# Altium PCB KCNFEQ_V0.1.PcbDoc
Units mil, origin at the board's own origin, x right, y up, seen from the top; angles counter-clockwise.
Board outline 1840 x 1600 mil, 2 copper layers (Top Layer, Bottom Layer); 24 components, 17 nets, 64 pads, 0 vias.
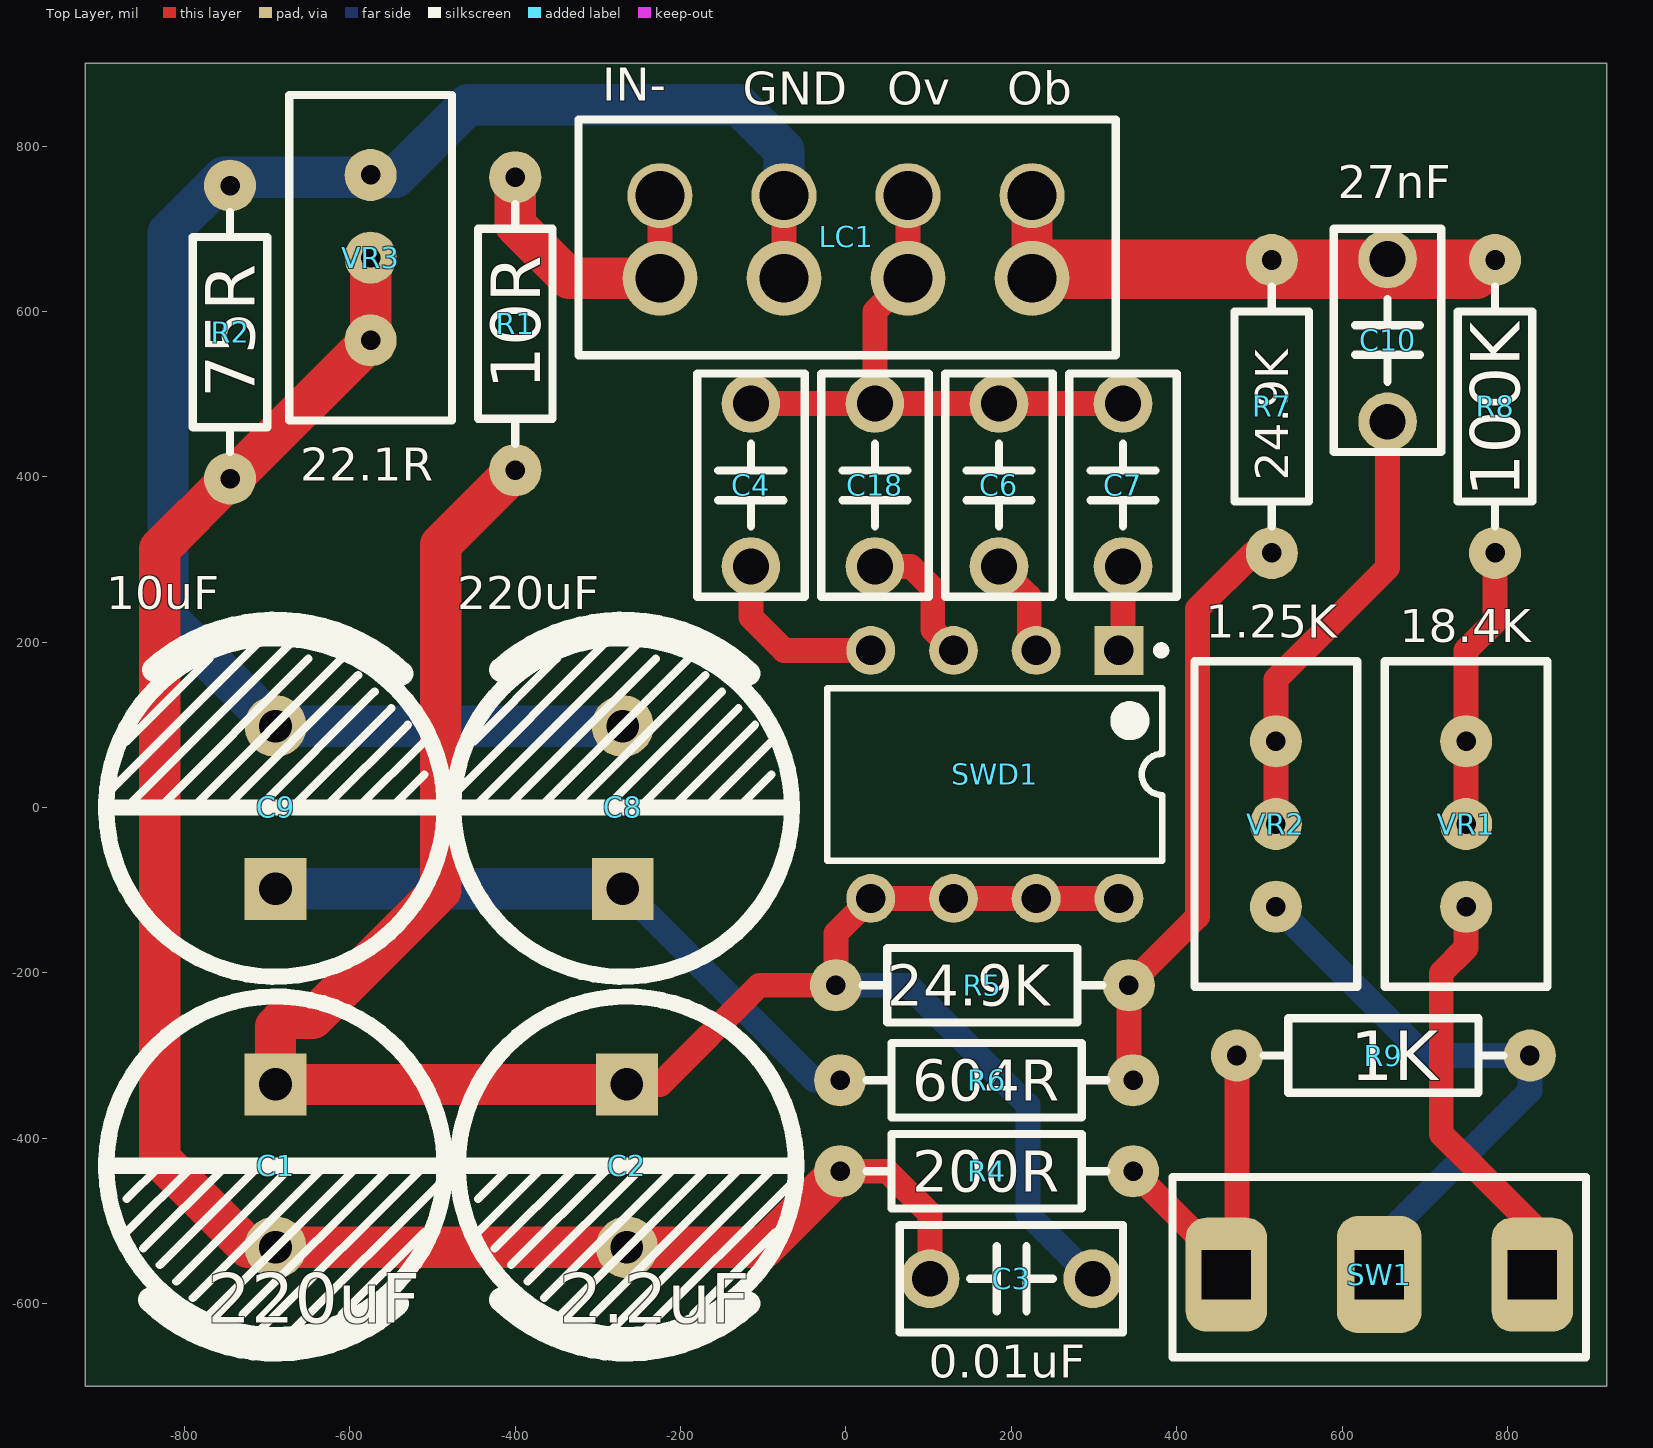
[diagram p0: Top Layer view]
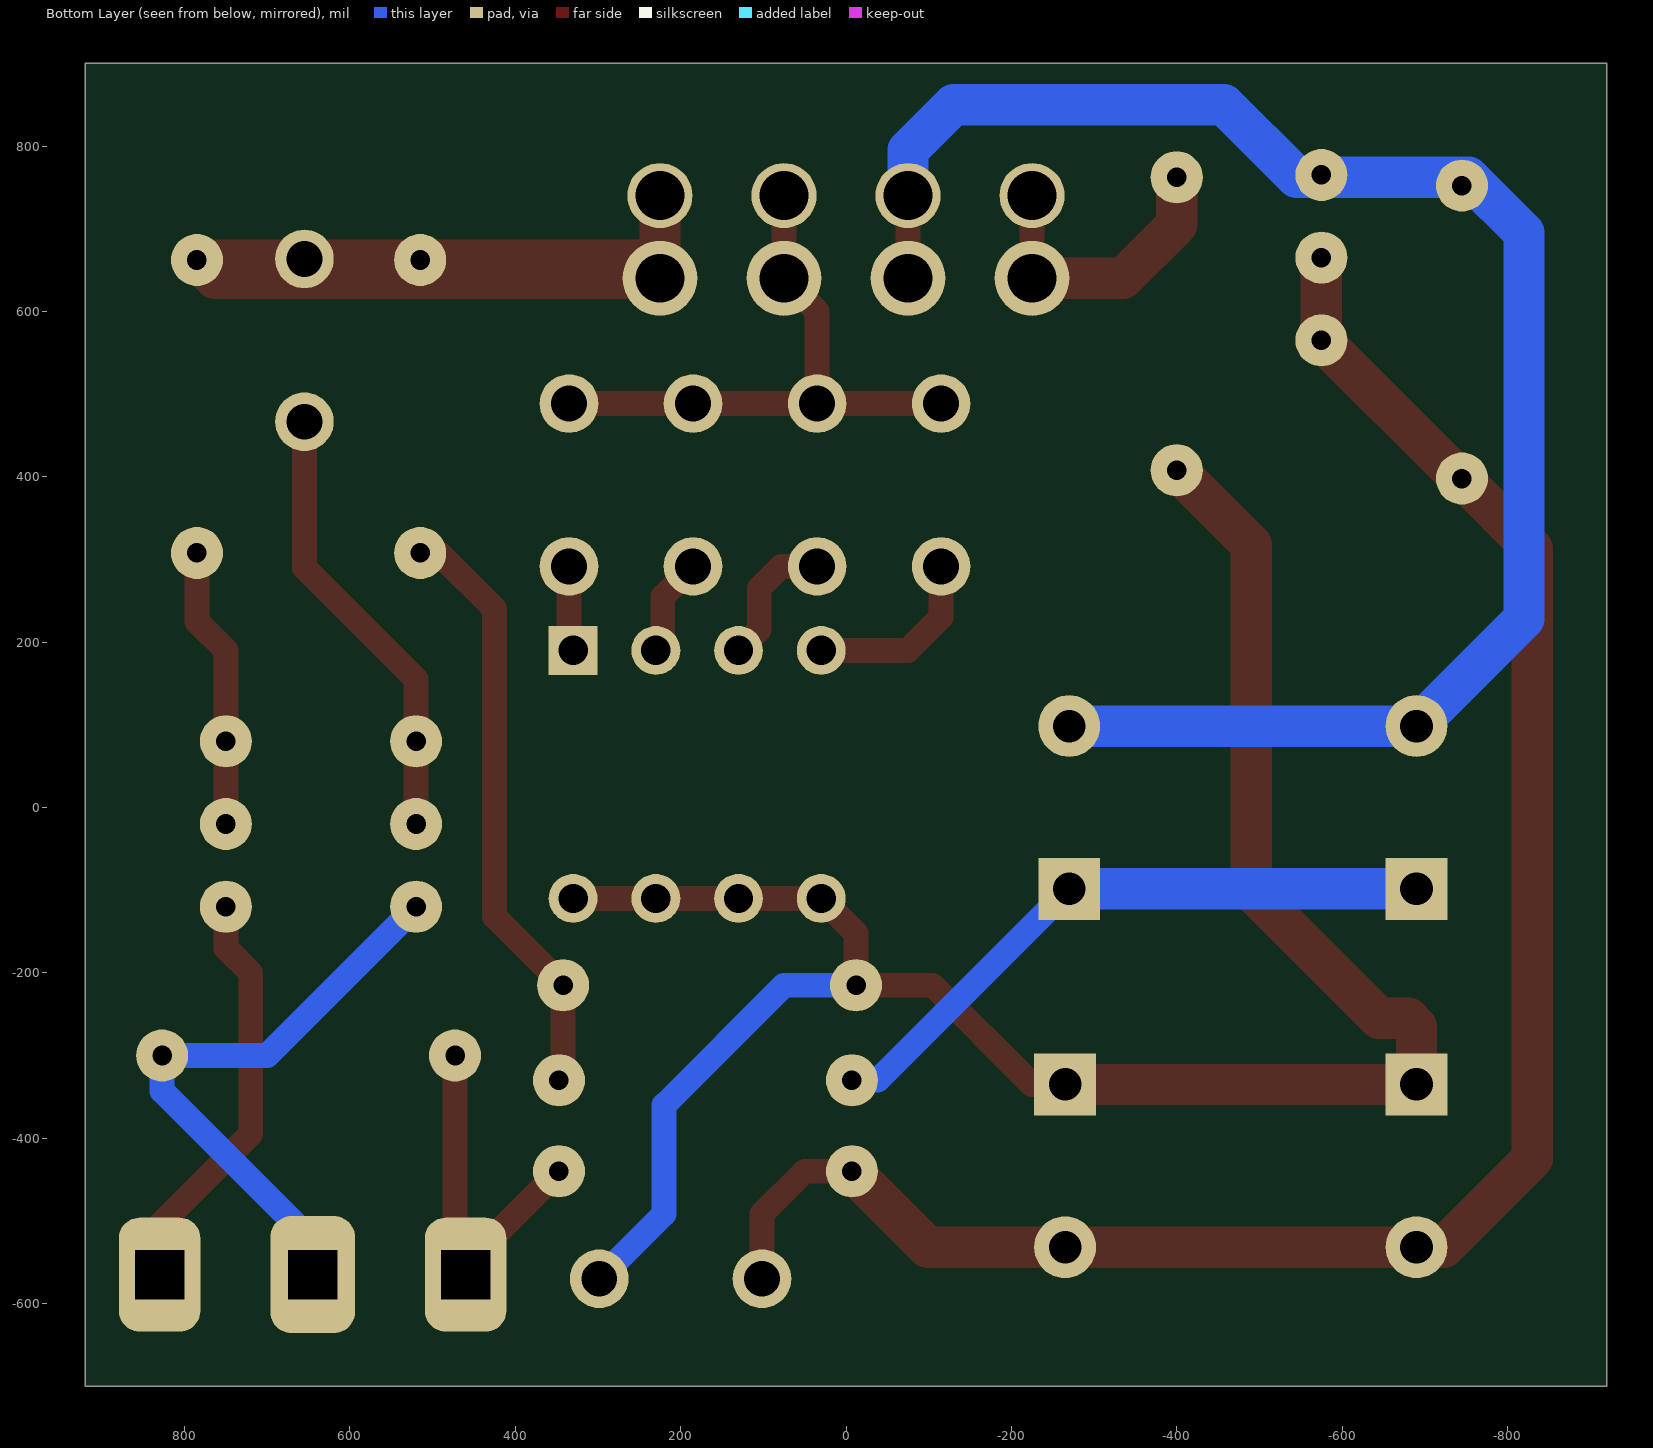
[diagram p1: Bottom Layer view, seen from below]
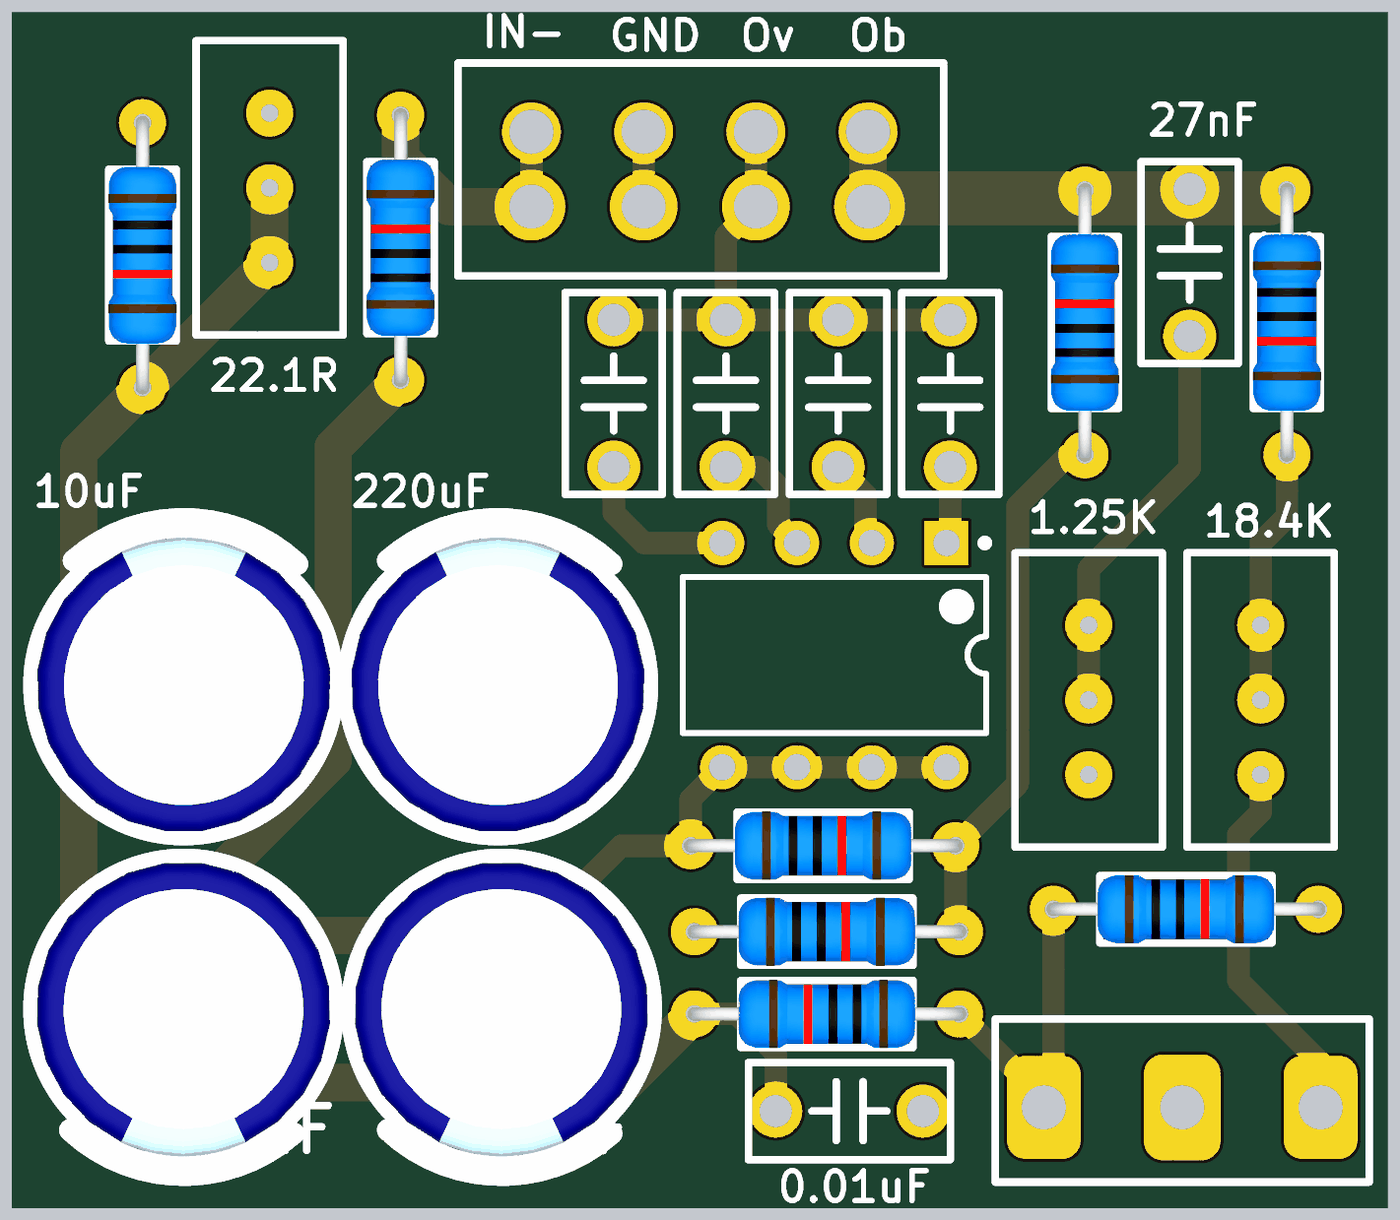
[diagram p2: 3D render of the assembled board from above, using the file's embedded part models]

## Layer stack, top to bottom
Top Solder: solder mask 0.4, Solder Resist, Dk 3.5
Top Layer: signal copper 1.4
Dielectric 1: dielectric 12.6, FR-4, Dk 4.8
Bottom Layer: signal copper 1.4
Bottom Solder: solder mask 0.4, Solder Resist, Dk 3.5

## Board outline
-920,-700 920,-700 920,900 -920,900

## Design rules (kind name [scope] priority, off if disabled: settings)
Clearance [All] p1: gap=10 ignorepadtopadclearanceinfootprint=FALSE except(0: Arc-Hole Track-Hole SMDPad-Hole THPad-Hole Via-Hole Fill-Hole Poly-Hole Region-Hole Text-Hole)
PolygonConnect [All] p1: connectstyle=Relief reliefconductorwidth=10 reliefentries=4 polygonreliefangle="90 Angle" airgapwidth=10
RoomDefinition KCNFEQ_V0.1 [InComponentClass('KCNFEQ_V0.1')] p1: confinementstyle=ConfineIn formatcopy=TRUE lockcomponents=FALSE outline 965,-640 1185,-640 1185,-120 965,-120
RoutingVias [All] p1: holewidth=28 width=50 viastyle="Through Hole" minholewidth=28 minwidth=50 maxholewidth=28 maxwidth=50
SolderMaskExpansion [All] p1: expansion=4
Width [All] p1: maxlimit=200 minlimit=10 preferedwidth=50
30 further rules are at their usual default settings.

## Components (designator, comment, footprint, x,y, rotation, side; value= is the part's Value field where it differs from the comment)
C1 "220uF" "CAP 5.0*10*12.5" -690,-433.43 r270 top
C2 "2.2uF" "CAP 5.0*10*12.5" -265,-433.43 r270 top
C3 "0.01uF" "CBB 6.3*6.3*5" 200,-570 r180 top
C4 "100pF" "CBB 6.3*6.3*5" -115,390 r90 top
C6 "100pF" "CBB 6.3*6.3*5" 185,390 r90 top
C7 "20pF" "CBB 6.3*6.3*5" 335,390 r90 top
C8 "220uF" "CAP 5.0*10*12.5" -270,0 r90 top
C9 "10uF" "CAP 5.0*10*12.5" -690,0 r90 top
C10 "27nF" "CBB 6.3*6.3*5" 655,565 r270 top
C18 "60pF" "CBB 6.3*6.3*5" 35,390 r90 top
LC1 "KCNFEQ_LC12" LC12-3.81 -225,640 r0 top
R1 "10R" "RS 1/4W" -400,585 r90 top
R2 "75R" "RS 1/4W" -745,575 r270 top
R4 "200R" "RS 1/4W" 170,-440 r180 top
R5 "24.9K" "RS 1/4W" 165,-215 r0 top
R6 "604R" "RS 1/4W" 170,-330 r0 top
R7 "24.9K" "RS 1/4W" 515,485 r90 top
R8 "100K" "RS 1/4W" 785,485 r270 top
R9 "1K" "RS 1/4W" 650,-300 r0 top
SW1 "SW-3P-2S" SS-12D06 645.04,-565 r0 top
SWD1 "SW-DIP4" DIP-8 180,40 r270 top
VR1 "18.4K" "RS 1/2W-VR" 750,-20 r270 top
VR2 "1.25K" "RS 1/2W-VR" 520,-20 r270 top
VR3 "22.1R" "RS 1/2W-VR" -575,665 r90 top

## Footprints (in the part's own frame and the unit in brackets; to place one, negate y for a bottom-side part, rotate by r counter-clockwise, add the part's x,y. Pads: shape width x height; smd on the part's side, far side on the other; paste and mask are expansions set on the pad)
"CAP 5.0*10*12.5" [mm] "脚距5mm直径10mm高度12.5mm"
  rect 1.9x1.9 hole 1: 1(-2.5,0)
  round 1.9 hole 1: 2(2.5,0)
  silkscreen extent -5.2,-5.2 5.64,5.2, body extent -5,-5.01 5.01,4.99, height 12.55
"CBB 6.3*6.3*5" [mm] "脚距5mm高6.3mm厚3mm"
  round 1.8 hole 1.1: 1(-2.5,0) 2(2.5,0)
  silkscreen extent -3.43,-1.65 3.43,1.65, body extent -3.15,-1.5 3.15,1.5, height 6.8
DIP-8 [mm] "DIP; 8 Leads; Row Spacing 7.62 mm; Pitch 2.54 mm"
  rect 1.5x1.5 hole 0.9: 1(-3.81,3.81)
  round 1.5 hole 0.9: 2(-3.81,1.27) 3(-3.81,-1.27) 4(-3.81,-3.81) 5(3.81,-3.81) 6(3.81,-1.27) 7(3.81,1.27) 8(3.81,3.81)
  silkscreen extent -3.93,-5.15 2.65,5.23, body extent -3.6,-5.15 3.6,5.15, height 5.08
LC12-3.81 [mm] "Double Pole Switch 6 Pin"
  round 2.3 hole 1.5: 1(0,0) 2(3.81,0) 3(7.62,0) 4(11.43,0)
  round 2 hole 1.5: 5(0,2.54) 6(3.81,2.54) 7(7.62,2.54) 8(11.43,2.54)
  silkscreen extent -2.5,-2.36 14,4.88
"RS 1/2W-VR" [mm] "直插3脚顶调可调电阻，脚距2.54mm，长10mm*宽5mm*高10mm"
  round 1.6 hole 0.6: 1(-2.54,0) 2(2.54,0) 3(0,0)
  silkscreen extent -5,-2.5 5,2.5
"RS 1/4W" [mm] "直插色环电阻，脚距9mm，直径2.3mm"
  round 1.6 hole 0.6: 1(-4.5,0) 2(4.5,0)
  silkscreen extent -3.68,-1.14 3.68,1.14, body extent -4.72,-1.16 4.73,1.16, height 2.32
SS-12D06 [mm]
  rrect50% 2.5x3.5 hole 1.5 square: 1(-4.7,0) 3(4.7,0)
  rrect50% 2.6x3.6 hole 1.5 square: 2(0,0)
  silkscreen extent -6.35,-2.54 6.35,3

## Part data
C1 C2 C8 C9: library part C-CAP, "直插电解电容", BOM名称=直插电解电容, 学习资源=www.ooocke.com, 版权归属=源创客
C3 C4 C6 C7 C10 C18: library part C-CBB, "CBB电容", BOM名称=CBB电容, 学习资源=www.ooocke.com, 版权归属=源创客
LC1: "King Cello Negative Feedback and EQ Board"
R1 R2 R4 R5 R6 R7 R8 R9: library part R-CRR, "直插色环电阻", BOM名称=色环电阻, 学习资源=www.ooocke.com, 版权归属=源创客
SW1: "3 Pin 2 Switch"
SWD1: "DIP Switch", LatestRevisionDate=17-Jul-2002, LatestRevisionNote="Re-released for DXP Platform.", PackageReference=DIP-8, Published=24-Mar-1999, Publisher="Altium Limited"
VR1 VR2 VR3: library part VR-W, "直插可调电阻-顶调"

## Nets (pads, with @x,y where several pads share a name; then routed paths per layer and width w, separated by ;. In a path a pad name is that pad's centre, name@x,y a point inside that pad or via, vN(x,y) a via of type N, cw(c..) or ccw(c..) an arc to the next point about the centre after c; other vN are vias at no path point)
NetC1_1: C1.1 C2.1 C3.1 R1.1 R5.1 SWD1.5 SWD1.6 SWD1.7 SWD1.8 | length 2568.2
  Top Layer w30: C2.1 -225,-335 -105,-215 R5.1 -12.17,-152.17 SWD1.5 SWD1.6 SWD1.7 SWD1.8
  Top Layer w50: R1.1 -490,317.83 -490,-100 -645,-255 -680,-255 -690,-265 C1.1 C2.1
  Bottom Layer w30: R5.1 75,-215 220,-360 220,-491.57 C3.1
NetC1_2: C1.2 C2.2 C3.2 R2.2 R4.2 VR3.1 VR3.3 | length 2326
  Top Layer w30: R4.2 50,-440 101.57,-491.57 C3.2 C3.2@101.57,-585
  Top Layer w50: VR3.3 VR3.1 -742.17,397.83 R2.2 -830,312.83 -830,-425 -723.15,-531.85 C1.2 C2.2 -99.02,-531.85 R4.2
NetC4_1: C4.1 SWD1.4 | length 223.1
  Top Layer w30: C4.1 -115,230 -75,190 SWD1.4
NetC4_2: C4.2 C6.2 C7.2 C18.2 LC1.3 LC1.7 | length 718.1
  Top Layer w30: C4.2 C18.2 ; LC1.7 LC1.3 35,600 C18.2 ; C7.2 C6.2 C18.2
NetC6_1: C6.1 SWD1.2 | length 120.2
  Top Layer w30: C6.1 221.57,255 221.57,198.43 SWD1.2
NetC7_1: C7.1 SWD1.1 | length 103.6
  Top Layer w30: SWD1.1 335,195 C7.1
NetC8_1: C8.1 C9.1 R6.1 | length 778.8
  Bottom Layer w30: C8.1 -38.43,-330 R6.1
  Bottom Layer w50: C9.1 C8.1
NetC8_2: C8.2 C9.2 LC1.2 LC1.6 R2.1 VR3.2 | length 2057.4
  Top Layer w30: LC1.2 LC1.6
  Bottom Layer w50: C8.2 C9.2 -820,228.43 -820,695 -752.83,762.17 -545,762.17 -457.17,850 -130,850 -75,795 LC1.6
NetC10_1: C10.1 LC1.4 LC1.8 R7.2 R8.1 | length 1238.4
  Top Layer w50: LC1.8 LC1.4 ; LC1.4 247.17,662.17 R7.2 R8.1 762.83,640 LC1.4
NetC10_2: C10.2 VR2.1 VR2.3 | length 542.5
  Top Layer w30: VR2.3 VR2.1 520,155 655,290 C10.2
NetC18_1: C18.1 SWD1.3 | length 166.4
  Top Layer w30: C18.1 78.43,291.57 105,265 105,215 SWD1.3
NetLC1_1: LC1.1 LC1.5 R1.2 | length 359.1
  Top Layer w30: LC1.1 LC1.5
  Top Layer w50: R1.2 -400,705 -335,640 LC1.1
NetR4_1: R4.1 R9.1 SW1.1 | length 442.1
  Top Layer w30: R4.1 460,-552.83 SW1.1 472.83,-552.17 R9.1
NetR5_2: R5.2 R6.2 R7.1 | length 724.5
  Top Layer w30: R6.2 342.17,-325 R5.2 425,-132.17 425,240 492.83,307.83 R7.1
NetR8_2: R8.2 VR1.1 VR1.3 | length 342.3
  Top Layer w30: VR1.3 VR1.1 750,190 785,225 R8.2
NetR9_2: R9.2 SW1.2 VR2.2 | length 722.2
  Bottom Layer w30: VR2.2 700,-300 R9.2 827.17,-342.83 645.04,-524.96 SW1.2
NetSW1_3: SW1.3 VR1.2 | length 503
  Top Layer w30: VR1.2 750,-170 720,-200 720,-395 830.08,-505.08 SW1.3

## Silkscreen, mask and mechanical layers (free items; w line width, h text height)
Top Overlay:
  text "IN-" at -295,855 h40
  text "GND" at -125,850 h40
  text "Ov" at 50,850 h40
  text "Ob" at 195,850 h40
Drill Drawing:
  the board outline again, w10